# EAGLE board box' (EAGLE 6.4)
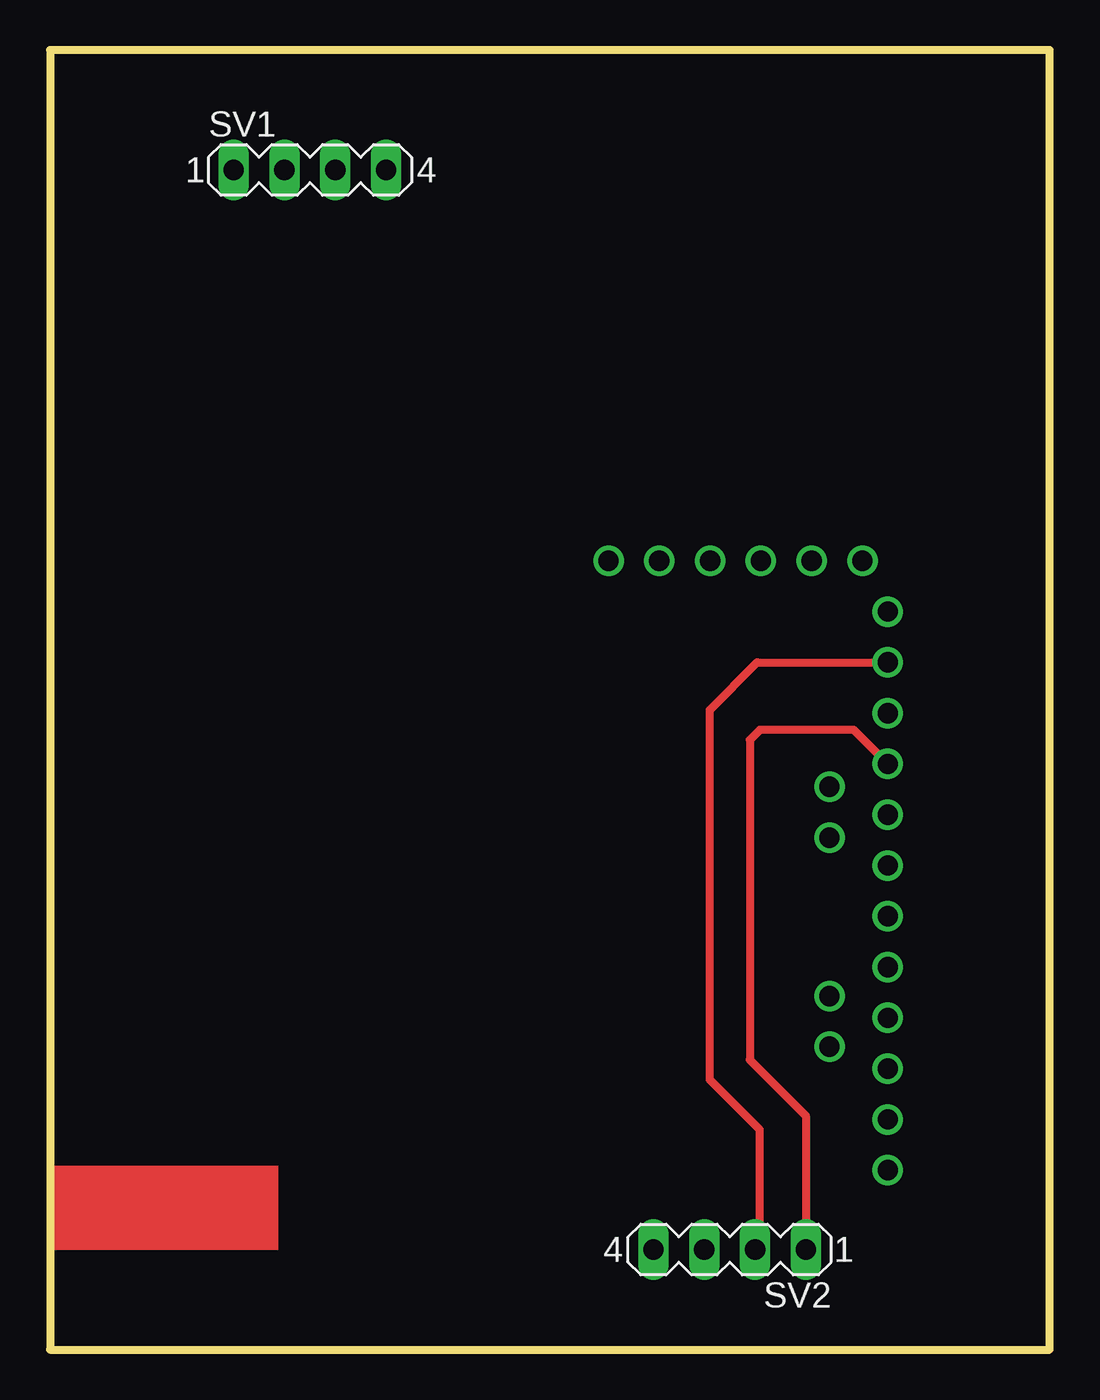
[diagram p0: board, top side]
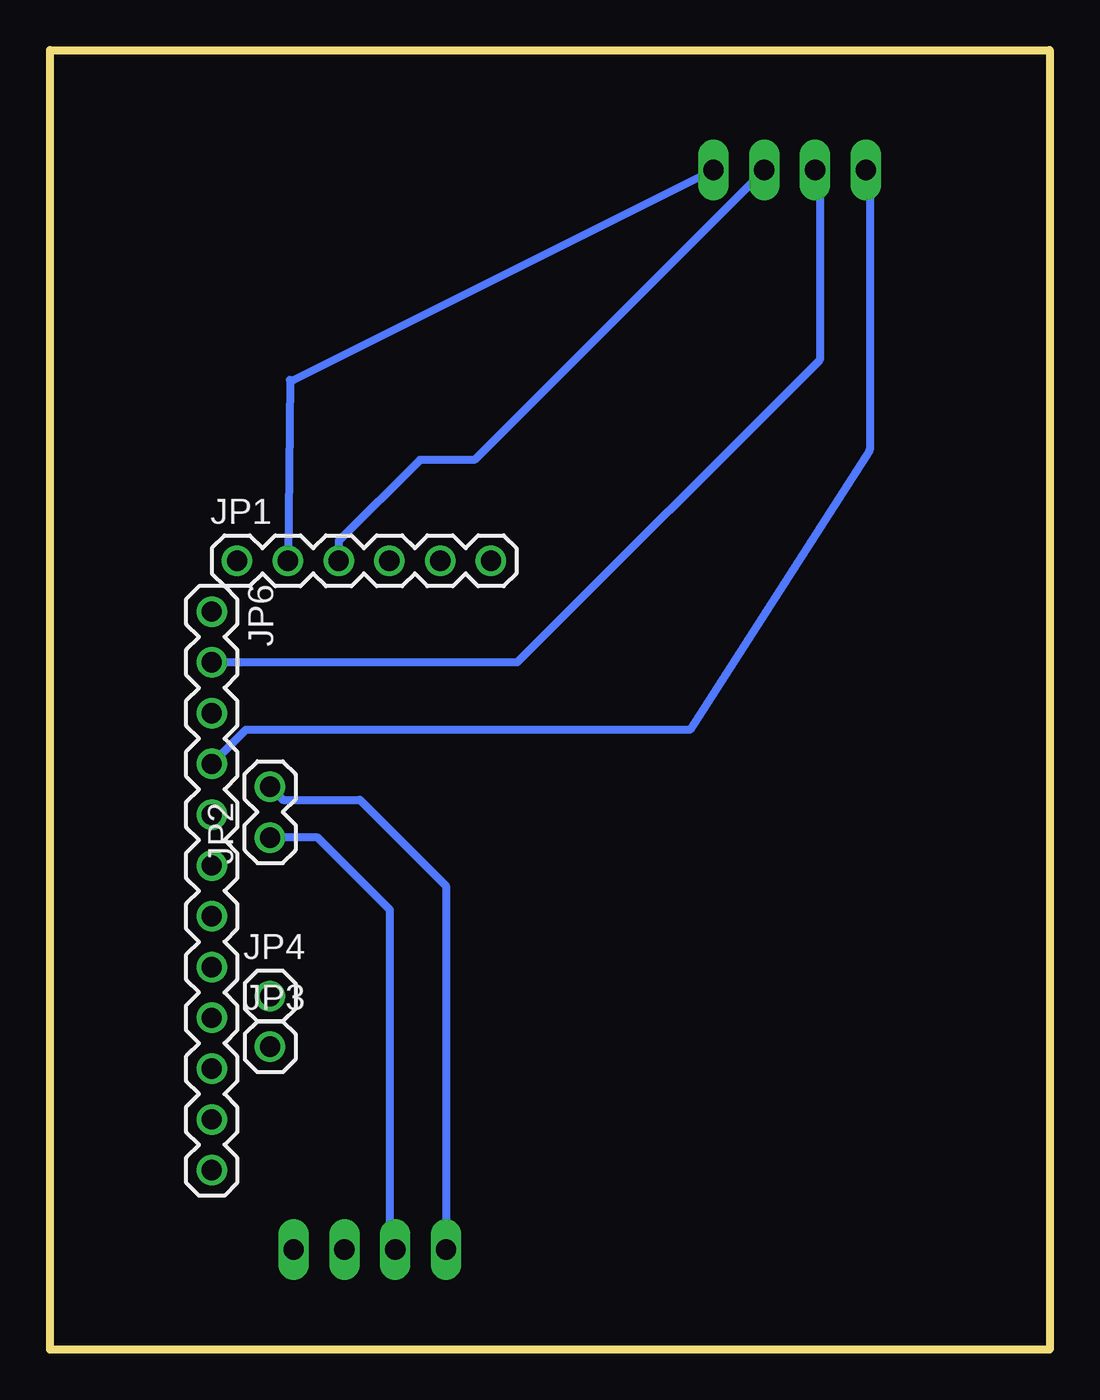
[diagram p1: board, bottom side, seen from below]

Size 50 x 65 mm. Coordinates in mm from the lower left corner, seen from the top.
Outline: 0,0 50,0 50,65 0,65 0,0
Copper layers (1*16): Top 0.035mm / dielectric 1.5mm / Bottom 0.035mm
Design rules "default": minimum track width 10mil, minimum drill 24mil, track to track 8mil, track to pad 8mil, pad to pad 8mil, via to via 8mil, smd to smd 8mil, copper to edge 40mil, drill to drill 8mil, minimum pad ring 10mil, minimum via ring 8mil, stop-mask expansion 4mil, vias tented up to drill 0mil, thermal gap 10mil
Net classes: 0 default: width 0.203 mm; 1 vcc: width 0.254 mm

## Footprints (pad centres in the part's own frame; a part is rotated, then mirrored left to right if it is on the bottom)
1X06 = drill 1.016: 1 0,0; 2 2.54,0; 3 5.08,0; 4 7.62,0; 5 10.16,0; 6 12.7,0
1X02 = drill 1.016: 1 0,0; 2 2.54,0
1X01 = drill 1.016: 1 0,0
1X12 = drill 1.016: 1 0,0; 2 2.54,0; 3 5.08,0; 4 7.62,0; 5 10.16,0; 6 12.7,0; 7 15.24,0; 8 17.78,0; 9 20.32,0; 10 22.86,0; 11 25.4,0; 12 27.94,0
MA04-1 = drill 1.016 long: 1 -3.81,0; 2 -1.27,0; 3 1.27,0; 4 3.81,0

## Placement (x,y rotation side)
JP1  FTDI Basic  [1X06]  40.64,39.45 0 bottom
JP2  [1X02]  38.99,25.61 90 bottom
JP3  [1X01]  38.99,15.14 0 bottom
JP4  [1X01]  38.99,17.68 0 bottom
JP6  [1X12]  41.91,36.91 270 bottom
SV1  [MA04-1]  13,59 0 top
SV2  [MA04-1]  34,5 180 top

## Library data of the parts
JP1-JP4 JP6 = SparkFun
SV1 SV2 = con-lstb; OC_FARNELL: unknown; OC_NEWARK: unknown

## Nets
S$1: SV1.4
S$2: JP1.3 SV1.3
S$3: JP2.2 SV2.4
S$4: JP2.1 SV2.3
S$5: JP6.2 SV1.2 SV2.2
S$6: JP6.4 SV1.1 SV2.1
S$7: JP1.2

## Tracks (layer width: path | path; a pad name or v marks a point on that pad's centre or on a via)
S$1
  Bottom 0.406: SV1.4 37.81,48.5
S$2
  Bottom 0.406: SV1.3 28.77,44.5 31.5,44.5 35.56,40.44 JP1.3
S$3
  Bottom 0.406: JP2.2 38.34,27.5 34.5,27.5 30.19,23.19 SV2.4
S$4
  Bottom 0.406: SV2.3 33,5.27 33,22 36.61,25.61 JP2.1
S$5
  Top 0.406: SV2.2 35.5,5.23 35.5,11 33,13.5 33,32 35.37,34.37 JP6.2
  Bottom 0.406: SV1.2 11.5,58.77 11.5,49.5 26.63,34.37 JP6.2
S$6
  Top 0.406: JP6.4 40.2,31 35.5,31 35,30.5 35,14.5 37.81,11.69 SV2.1
  Bottom 0.406: SV1.1 9,58.81 9,45 18,31 40.2,31 JP6.4
S$7
  Bottom 0.406: 38,48.5 JP1.2
(copper drawn outside any net)
  shapes: Top area x1